# Altium PCB STM32.PcbDoc (part 2 of 10)
Units mil, origin at the board's own origin, x right, y up, seen from the top; angles counter-clockwise.
Board outline 3925 x 3925 mil, 2 copper layers (Top Layer, Bottom Layer); 152 components, 142 nets, 670 pads, 189 vias.
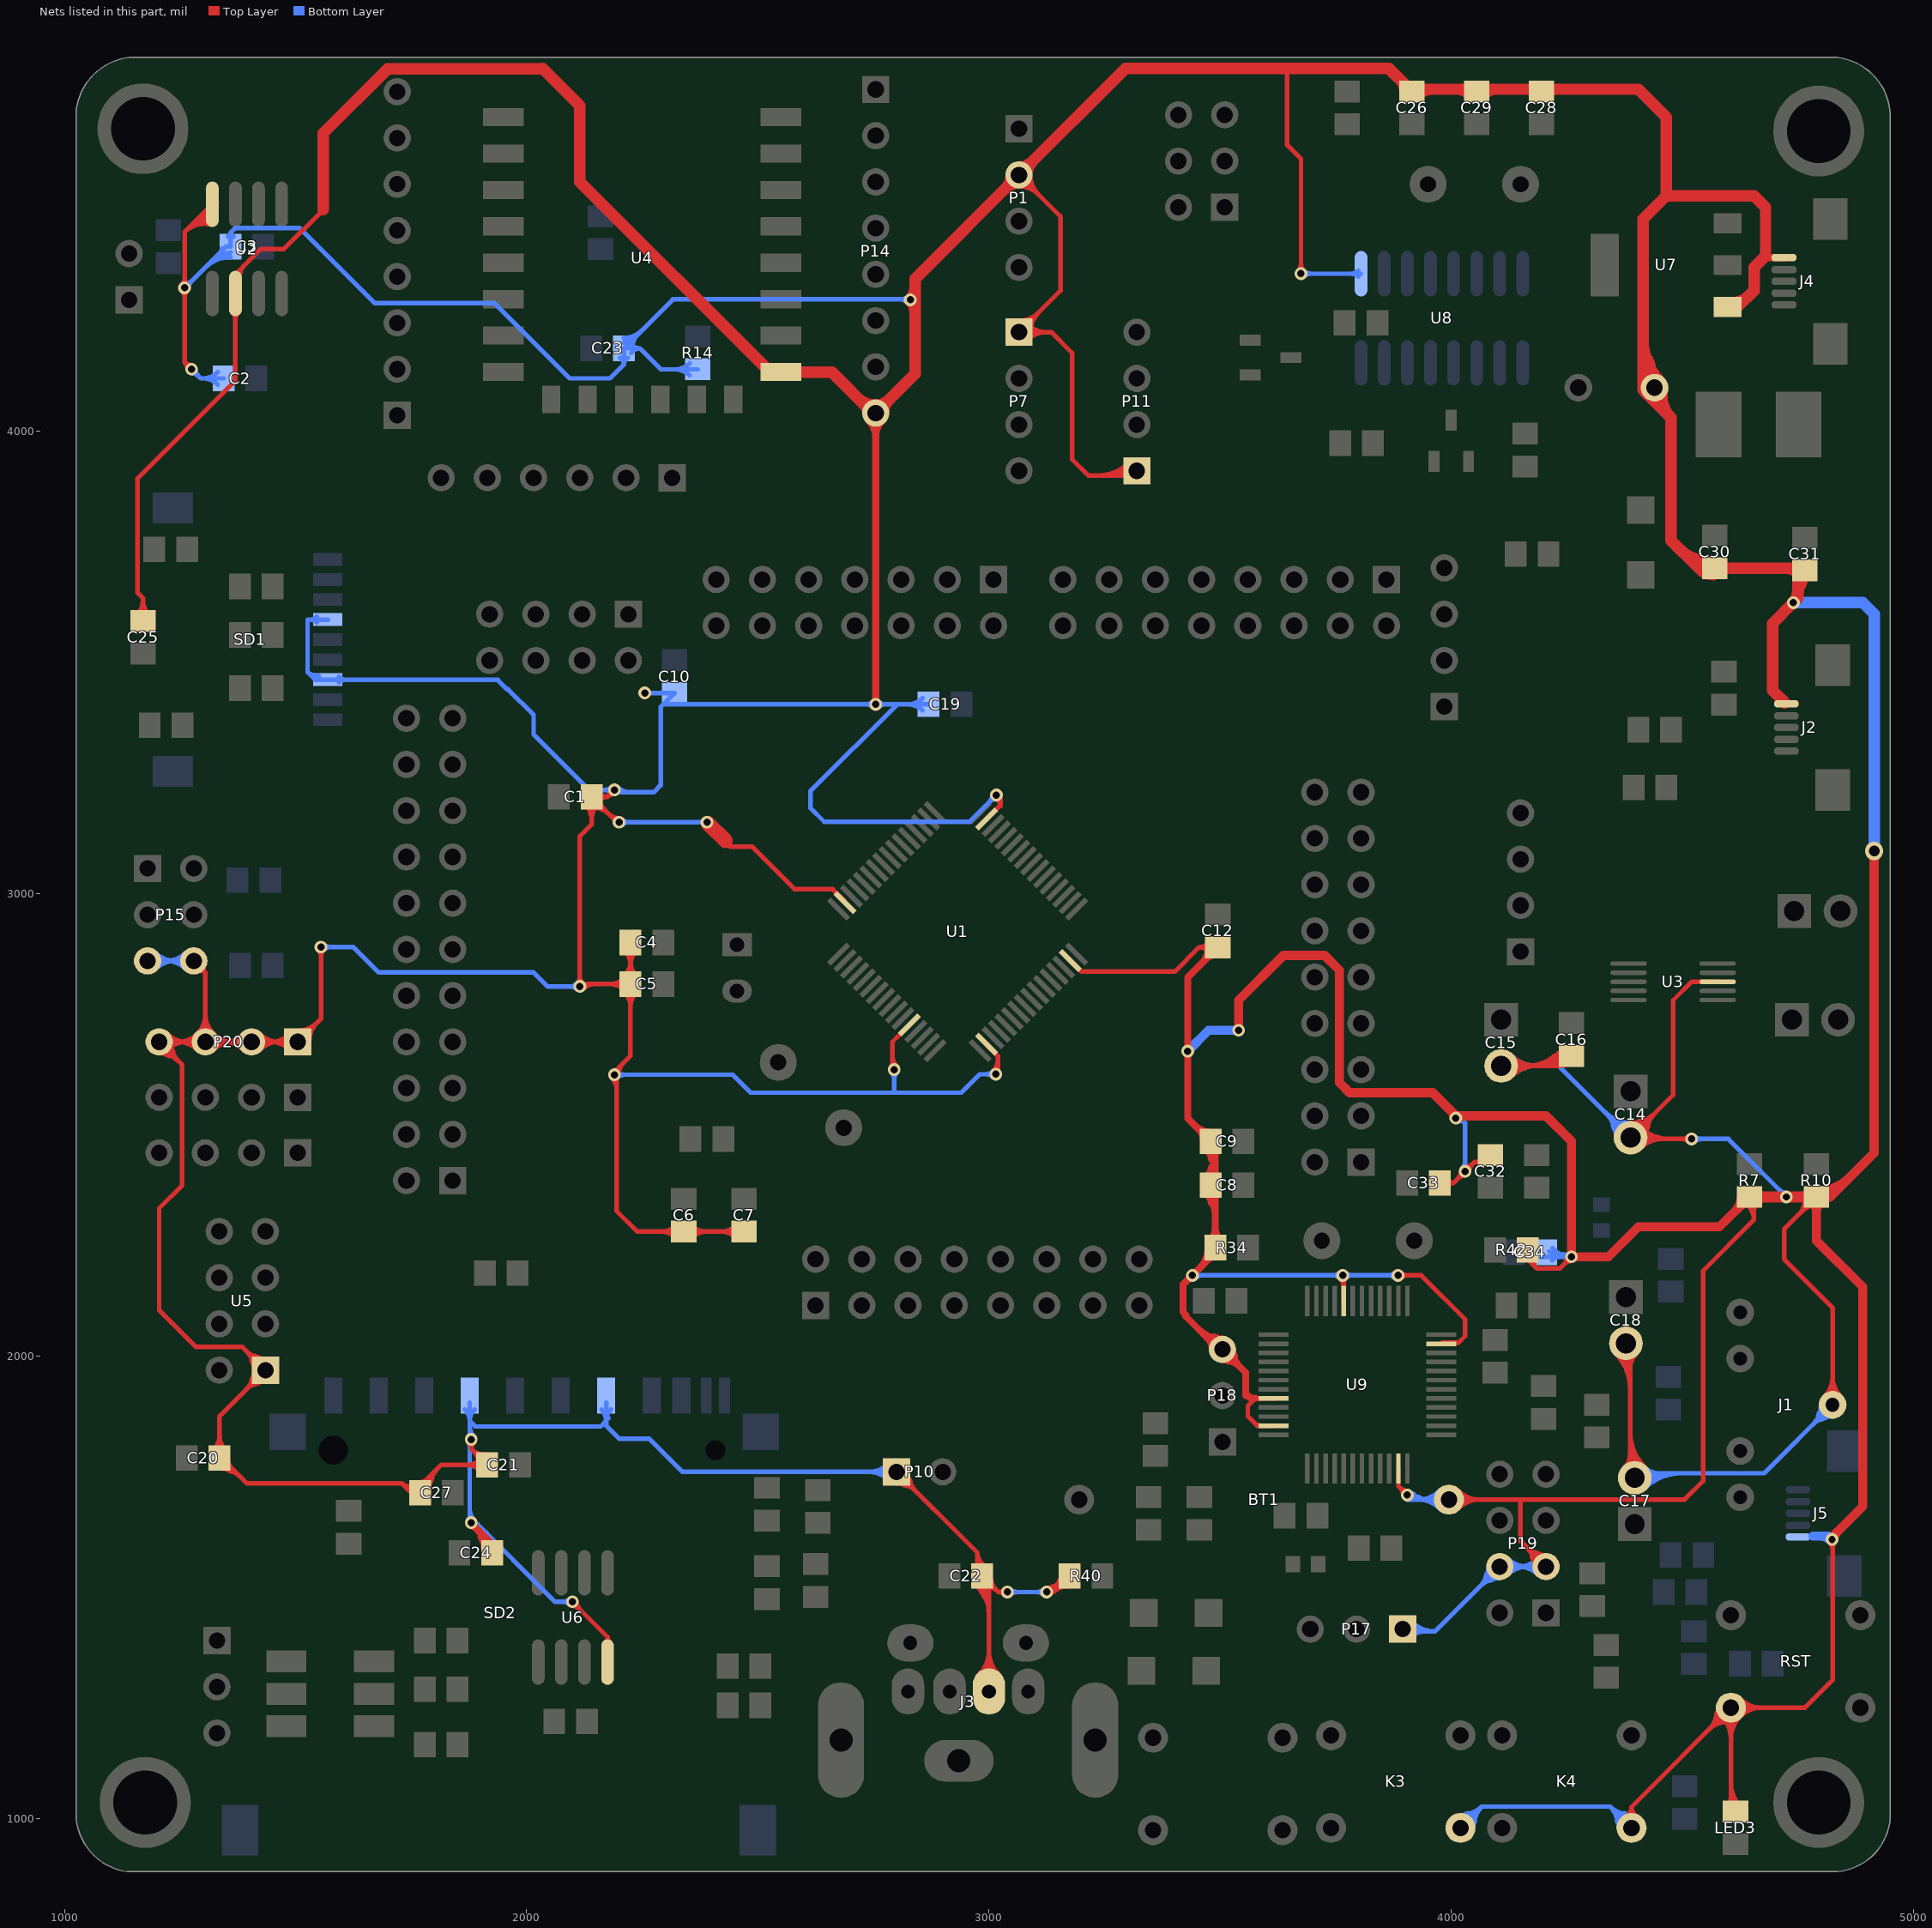
[diagram p2: the nets of this part, all layers, seen from the top]

## Via types
v1: diameter 27.56, hole 15.75, Top Layer to Bottom Layer, tented both sides, 185 vias
v2: diameter 39.37, hole 23.62, Top Layer to Bottom Layer, tented both sides, 3 vias
v3: diameter 39.37, hole 27.56, Top Layer to Bottom Layer, tented both sides, 1 vias

## Nets (pads, with @x,y where several pads share a name; then routed paths per layer and width w, separated by ;. In a path a pad name is that pad's centre, name@x,y a point inside that pad or via, vN(x,y) a via of type N, cw(c..) or ccw(c..) an arc to the next point about the centre after c; other vN are vias at no path point) (continued)
GND: BT1.2 C1.2 C2.2 C3.1 C4.1 C5.1 C6.1 C7.1 C8.1 C9.1 C10.2 C12.2 C14.2 C15.2 C16.2 C17.2 C18.2 C19.2 C20.1 C21.2 C22.1 C23.2 C24.2 C25.2 C26.2 C27.2 C28.1 C29.1 C30.1 C31.1 C32.1 C33.1 C34.1 J1.1 J2.4 J3.3 J4.4 J5.4 K3.1 K4.1 LED3.2 P1.2 P7.1 P10.1 P11.1 P14.8 P15.5 P15.6 P17.1 P18.3 P19.3 P19.4 P20.1 P20.2 P20.3 P20.4 pad.0@4440,4095 R7.1 R10.1 R14.1 R34.1 R40.1 R42.1 RST.2 SD1.3 SD1.6 SD2.3 SD2.6 U1.12 U1.18 U1.31 U1.47 U1.63 U2.2 U2.8 U3.8 U4.8 U5.1 U6.4 U7.1 U8.1 U9.8 U9.20 U9.23 U9.35 U9.47 | length 66983.9
  Top Layer w6: U1.63@2687.51,2984.47 2688.92,2985.88 U1.63@2688.92,2981.35
  Top Layer w10: C25.2@1170,3590.43 1170,3640 1158,3652 1158,3898 1370,4110 U2.2@1370,4298.54 1370,4340 1425,4395 1475,4395 1559.99,4479.99 ; P20.4@1199.64,2678.9 ccw(c1237.3,2686.61) 1227.35,2649.48 ; P20.4@1206.1,2685.36 cw(c1198.39,2647.7) 1235.52,2657.65 ; v1@1253.79,4304.91 cw(c1238.8,4289.92) 1260,4289.92 cw(c1281.2,4289.92) v1@1266.21,4304.91 ; v1@1253.79,4317.32 ccw(c1238.8,4332.31) 1260,4332.31 ccw(c1281.2,4332.31) v1@1266.21,4317.32 ; 1263.77,4144.15 ccw(c1277.64,4147.87) v1@1274.76,4133.8 ; 1265.85,4146.23 cw(c1262.13,4132.36) v1@1276.2,4135.24 ; 1272.5,4443.95 cw(c1308.11,4408.35) U2.8@1320.3,4457.21 ; v1(1275,4135) 1260,4150 ; P15.6@1280,2855 1305,2830 ; 1285,4456.45 cw(c1313.1,4428.35) U2.8@1322.72,4466.91 ; P20.3@1287.66,2662.66 ccw(c1245.79,2620.79) 1245.79,2680 ccw(c1245.79,2739.21) 1287.66,2697.34 ccw(c1245.79,2739.21) 1305,2739.21 ccw(c1364.21,2739.21) 1322.34,2697.34 ccw(c1364.21,2739.21) 1364.21,2680 ccw(c1364.21,2620.79) P20.3@1322.34,2662.66 ; 1297.49,4468.95 cw(c1318.09,4448.35) U2.8@1325.14,4476.61 ; U2.8@1309.99,4481.44 cw(c1323.08,4468.36) U2.8@1327.56,4486.32 ; U2.8@1317.88,4447.5 ccw(c1303.12,4388.34) 1260,4431.46 ; U2.8@1320,4491.46 1260,4431.46 ; U2.8@1322.48,4493.94 cw(c1328.07,4488.36) U2.8@1329.98,4496.02 ; C20.1@1334.13,1775.6 ccw(c1371.73,1789.06) 1361.4,1750.48 ; C20.1@1335.43,1780 C20.1@1335.43,1784.57 ; U2.2@1363.79,4256.9 cw(c1348.8,4241.92) 1370,4241.92 cw(c1391.2,4241.92) U2.2@1376.21,4256.9 ; U2.2@1378.78,4333.98 cw(c1414.52,4333.98) 1389.25,4359.25 ; P20.2@1387.66,2662.66 ccw(c1345.79,2620.79) 1345.79,2680 ccw(c1345.79,2739.21) P20.2@1387.66,2697.34 ; P20.2@1394.73,2669.73 ccw(c1369.93,2644.93) 1369.93,2680 ccw(c1369.93,2715.07) P20.2@1394.73,2690.27 ; 1404.48,1947.65 cw(c1441.61,1937.7) U5.1@1433.9,1975.36 ; 1404.48,1992.35 ccw(c1441.61,2002.3) U5.1@1433.9,1964.64 ; 1412.65,1939.48 ccw(c1402.7,1976.61) U5.1@1440.36,1968.9 ; 1412.65,2000.52 cw(c1402.7,1963.39) U5.1@1440.36,1971.1 ; P20.2@1415.27,2669.73 cw(c1440.07,2644.93) 1440.07,2680 cw(c1440.07,2715.07) P20.2@1415.27,2690.27 ; P20.2@1422.34,2662.66 cw(c1464.21,2620.79) 1464.21,2680 cw(c1464.21,2739.21) P20.2@1422.34,2697.34 ; P20.1@1487.66,2662.66 ccw(c1445.79,2620.79) 1445.79,2680 ccw(c1445.79,2739.21) P20.1@1487.66,2697.34 ; P20.1@1494.73,2669.73 ccw(c1469.93,2644.93) 1469.93,2680 ccw(c1469.93,2715.07) P20.1@1494.73,2690.27 ; P20.1@1505,2694.53 ccw(c1505,2729.6) 1529.8,2704.8 ccw(c1554.6,2680) P20.1@1519.53,2680 ; P20.1@1505,2704.53 ccw(c1505,2763.74) 1546.87,2721.87 ccw(c1588.74,2680) P20.1@1529.53,2680 ; v1@1548.79,2878.79 cw(c1533.8,2863.8) 1555,2863.8 cw(c1576.2,2863.8) v1@1561.21,2878.79 ; v1(1555,2885) 1555,2730 P20.1@1505,2680 P20.2@1405,2680 1323,2680 1323,2698 P20.3@1305,2680 ; C27.2@1770.07,1707.65 ccw(c1754.62,1747.01) 1795.46,1736.07 ; v1@1878.84,1639.63 ccw(c1895.1,1644.86) 1890.68,1628.36 ; v1@1881,1817 1881,1798.57 ; v1@1888.37,1637.33 ccw(c1900.91,1633.34) 1894.33,1621.94 ; 1898.58,1610.68 ccw(c1948.88,1623.78) C24.2@1924.8,1577.72 ; C24.2@1909.37,1588.36 ccw(c1895.12,1596.72) C24.2@1911.11,1600.89 ; 1909.36,1607.6 ccw(c1938.07,1615.08) C24.2@1928.28,1587.08 ; C24.2@1925.43,1575 1925.43,1597.57 v1@1881,1642 ; v1@2097.8,1468.76 ccw(c2111.87,1471.64) 2108.15,1457.77 ; v1(2099,1469) 2175,1393 ; v1@2099.24,1470.2 cw(c2096.36,1456.13) 2110.23,1459.85 ; v1@2108.79,2806.21 ccw(c2093.8,2821.2) 2115,2821.2 ccw(c2136.2,2821.2) v1@2121.21,2806.21 ; v1@2115,2805 2115,3124.57 2140.43,3150 C1.2@2140.43,3210 ; v1@2120,2805 C5.1@2224.57,2805 ; v1@2121.21,2793.79 cw(c2148.27,2766.73) 2148.27,2805 ; C1.2@2127.27,3192.9 cw(c2095.48,3161.11) 2140.43,3161.11 cw(c2185.39,3161.11) C1.2@2153.6,3192.9 ; C1.2@2140.43,3187.44 cw(c2140.43,3132.98) 2178.94,3171.49 ; C1.2@2140.43,3197.44 cw(c2140.43,3167.12) C1.2@2161.87,3188.56 ; C1.2@2155.99,3199.76 cw(c2175,3187.23) 2175,3210 ; C1.2@2155.99,3220.24 ccw(c2175,3232.77) 2175,3210 ; C1.2@2159.06,3206.06 ccw(c2194.51,3206.06) 2169.44,3180.99 ; U6.4@2175,1338.54 2175,1393 ; 2177.22,3173.22 ccw(c2200,3196) v1@2200,3163.78 ; v1@2181.22,3225 cw(c2160.02,3225) 2175.01,3210.01 ; v1@2183.79,2602.79 cw(c2157.78,2576.78) 2194.57,2576.78 ; v1@2190,3216.22 ccw(c2190,3195.02) 2175.01,3210.01 ; v1(2190,3225) 2175,3210 ; v1@2195.95,3154.48 C1.2@2140.43,3210 ; v1@2198.78,2609 cw(c2234.46,2609) 2209.23,2634.23 ; C5.1@2211.4,2787.9 cw(c2179.61,2756.11) 2224.57,2756.11 cw(c2269.53,2756.11) C5.1@2237.74,2787.9 ; C5.1@2211.4,2791.83 ccw(c2179.61,2760.04) 2179.61,2805 ccw(c2179.61,2849.96) C5.1@2211.4,2818.17 ; C5.1@2211.4,2822.11 ccw(c2179.61,2853.9) 2224.57,2853.9 ccw(c2269.53,2853.9) C5.1@2237.74,2822.11 ; C4.1@2211.4,2877.9 cw(c2179.61,2846.11) 2224.57,2846.11 cw(c2269.53,2846.11) C4.1@2237.74,2877.9 ; C4.1@2224.57,2895 C5.1@2224.57,2805 ; C6.1@2322.9,2256.4 ccw(c2291.11,2224.61) 2291.11,2269.57 ccw(c2291.11,2314.53) C6.1@2322.9,2282.74 ; C6.1@2357.1,2256.4 cw(c2388.89,2224.61) 2388.89,2269.57 cw(c2388.89,2314.53) C6.1@2357.1,2282.74 ; v1@2390,3145 v1(2390,3155) v1@2395,3155 ; 2440,3102.5 2487.5,3102.5 2580,3010 2661.98,3010 U1.63@2687.51,2984.47 ; C7.1@2452.9,2256.4 ccw(c2421.11,2224.61) 2421.11,2269.57 ccw(c2421.11,2314.53) C7.1@2452.9,2282.74 ; C7.1@2470,2269.57 C6.1@2340,2269.57 2239.43,2269.57 2194.57,2314.43 2194.57,2619.57 2224.57,2649.57 C5.1@2224.57,2805 ; v1@2791.26,2623.26 2791.26,2680.03 2806.26,2695.03 ; 2791.26,2650.22 ccw(c2825.22,2650.22) v1@2801.21,2626.21 ; P10.1@2794.64,1748.9 ccw(c2832.3,1756.61) 2822.35,1719.48 ; P10.1@2800,1750 2975,1575 ; P10.1@2801.1,1755.36 cw(c2793.39,1717.7) 2830.52,1727.65 ; 2979.32,1496.44 cw(c2995.65,1506.49) C22.1@2984.64,1522.19 ; C22.1@2980.61,1503.08 cw(c2976.34,1487.12) 2990.65,1495.38 ; 2984.89,1487.4 cw(c3001.75,1497.79) C22.1@2990.38,1514 ; 2990.45,1478.36 cw(c3007.85,1489.08) C22.1@2996.12,1505.81 ; U1.18@2995.15,2675.13 2995.15,2673.43 3019.16,2649.41 v1@3019.16,2614.16 ; U1.47@2995.15,3162.31 3025,3192.16 3025,3205 v1(3016,3214) ; 2995.19,1487.51 cw(c3009.24,1495.62) C22.1@2998.16,1507.47 ; J3.3@3000,1275 3000,1500 3010.43,1500 ; v1@3008.79,2616.21 ccw(c2983.75,2641.25) 3019.16,2641.25 ; v1@3013.57,3205.56 cw(c3009.2,3190.38) 3025,3190.38 ; v1(3040,1490) 3020.43,1490 ; P7.1@3065,4229.53 ccw(c3065,4264.6) 3089.8,4239.8 ccw(c3114.6,4215) P7.1@3079.53,4215 ; P7.1@3065,4239.53 ccw(c3065,4298.74) 3106.87,4256.87 ccw(c3148.74,4215) P7.1@3089.53,4215 ; P1.2@3065,4530.47 cw(c3065,4471.26) 3106.87,4513.13 cw(c3148.74,4555) P1.2@3089.53,4555 ; P1.2@3065,4540.47 cw(c3065,4505.4) 3089.8,4530.2 cw(c3114.6,4555) P1.2@3079.53,4555 ; P1.2@3065,4555 3155,4465 3155,4305 P7.1@3065,4215 3135,4215 3180,4170 3180,3940 3215,3905 P11.1@3320,3905 ; P7.1@3075.27,4204.73 cw(c3100.07,4179.93) 3100.07,4215 cw(c3100.07,4250.07) P7.1@3075.27,4225.27 ; P7.1@3082.34,4197.65 cw(c3124.21,4155.78) 3124.21,4215 cw(c3124.21,4274.21) P7.1@3082.34,4232.34 ; v1@3123.94,1490.61 cw(c3146.47,1477.61) 3139.73,1502.73 ; v1(3125,1490) 3139.57,1490 ; v1@3132.16,1495.08 ccw(c3137.46,1498.85) 3139.14,1492.57 ccw(c3141.34,1484.34) v1@3133.3,1487.13 ; R40.1@3156.25,1524.4 cw(c3122.23,1530.61) 3139.52,1500.66 cw(c3157.08,1470.24) R40.1@3168.51,1503.45 ; R40.1@3174.57,1525 3139.57,1490 ; U1.31@3176.1,2856.08 3200.12,2832.06 3402.06,2832.06 3454.57,2884.57 ; 3236.64,3905 ccw(c3236.64,3998.36) P11.1@3302.66,3932.34 ; 3260.79,3905 ccw(c3260.79,3974.21) P11.1@3309.73,3925.27 ; P11.1@3302.66,3897.66 ccw(c3284.93,3879.93) 3284.93,3905 ccw(c3284.93,3950.07) P11.1@3316.8,3918.2 ; C12.2@3495,2884.57 3454.57,2884.57 ; U9.23@3615.92,1849.89 3580.11,1849.89 3560,1870 3560,1892.9 3578.25,1911.15 ; U9.20@3615.92,1908.95 3580.46,1908.95 3578.25,1911.15 ; 3645,4777 3645,4620 3675,4590 v1(3675,4341.46) ; v1@3668.79,4347.66 ccw(c3653.8,4362.65) 3675,4362.65 ccw(c3696.2,4362.65) v1@3681.21,4347.66 ; v1(3765.29,2175) 3767.5,2172.8 U9.8@3767.5,2119.58 ; v1(3885,2175) 3935,2175 4030,2080 4030,2043.47 4015.8,2029.26 3980.33,2029.26 U9.47@3978.13,2027.06 ; U9.35@3885.61,1757.37 3885.61,1719.39 v1(3905,1700) ; 3893.77,1709.15 ccw(c3907.64,1712.87) v1@3904.76,1698.8 ; 3895.85,1711.23 cw(c3892.13,1697.36) v1@3906.2,1700.24 ; C33.1@3975.43,2375 4005,2375 ; BT1.2@3995,1690 4155,1690 ; 4018.77,2390.85 cw(c4032.64,2387.13) v1@4029.76,2401.2 ; 4020.85,2388.77 ccw(c4017.13,2402.64) v1@4031.2,2399.76 ; v1@4028.8,2400.24 cw(c4042.87,2397.36) 4039.15,2411.23 ; v1@4030.24,2398.8 ccw(c4027.36,2412.87) 4041.23,2409.15 ; C32.1@4089.57,2420 4050,2420 v1(4030,2400) 4005,2375 ; C15.2@4101.43,2634.57 C15.2@4108,2628 4238.44,2628 C16.2@4260,2649.57 ; R42.1@4160.43,2225 4160.43,2214.57 4185,2190 ; 4174.48,1567.35 ccw(c4211.61,1577.3) P19.3@4203.9,1539.64 ; 4182.65,1575.52 cw(c4172.7,1538.39) P19.3@4210.36,1546.1 ; P19.3@4205,1545 4150,1600 4150,1685 4155,1690 ; 4211.79,2633.62 cw(c4229.12,2603.62) C16.2@4246.64,2633.5 ; 4212.48,2641.98 cw(c4224.78,2623.97) C16.2@4241.65,2637.77 ; 4221.49,2648.13 cw(c4233.25,2630.9) C16.2@4249.39,2644.11 ; 4226.68,2642.21 cw(c4239.12,2620.67) C16.2@4251.7,2642.13 ; 4230.38,2644.35 ccw(c4222.12,2658.66) C16.2@4238.08,2654.39 ; 4230.5,2654.28 cw(c4241.73,2637.83) C16.2@4257.13,2650.44 ; C16.2@4237.47,2650.56 cw(c4212.21,2651.92) 4224.86,2630.01 cw(c4239.45,2604.74) C16.2@4249.59,2632.1 ; 4248.77,2205.85 cw(c4262.64,2202.13) v1@4259.76,2216.2 ; 4250.85,2203.77 ccw(c4247.13,2217.64) v1@4261.2,2214.76 ; v1(4260,2215) 4235,2190 4185,2190 ; C18.2@4378,2028 4387,2019 C17.2@4387,1737 ; C14.2@4379.59,2474.72 cw(c4426.58,2465.1) 4414.17,2511.43 ; C14.2@4387.72,2474.39 ccw(c4376.47,2529.31) 4430.62,2514.8 ; C14.2@4389.39,2472.72 cw(c4444.31,2461.47) 4429.8,2515.62 ; C14.2@4389.72,2464.59 ccw(c4380.1,2511.58) 4426.43,2499.17 ; K4.1@4390,980 4390,1025 ; C14.2@4390.76,2484.08 ccw(c4396.45,2506.93) 4417.26,2495.91 ; C14.2@4393.18,2493.78 ccw(c4399.63,2519.71) 4423.25,2507.2 ; C14.2@4397.23,2503.03 ccw(c4404.34,2526.13) 4415.65,2504.77 ; C14.2@4397.46,2502.96 ccw(c4405.56,2528.63) 4424.56,2509.56 ; C14.2@4397.51,2502.94 ccw(c4405.61,2528.45) 4424.56,2509.56 ; C14.2@4397.56,2502.93 ccw(c4405.66,2528.24) 4424.42,2509.42 ; C14.2@4397.61,2502.91 ccw(c4405.7,2528.07) 4424.42,2509.42 ; C14.2@4399.08,2475.76 cw(c4421.93,2481.45) 4410.91,2502.26 ; C14.2@4408.78,2478.18 cw(c4434.71,2484.63) 4422.2,2508.25 ; C14.2@4417.91,2482.61 cw(c4443.07,2490.7) 4424.42,2509.42 ; C14.2@4417.96,2482.46 cw(c4443.63,2490.56) 4424.56,2509.56 ; C14.2@4417.94,2482.51 cw(c4443.45,2490.61) 4424.56,2509.56 ; C14.2@4417.93,2482.56 cw(c4443.24,2490.66) 4424.42,2509.42 ; C14.2@4418.03,2482.23 cw(c4441.13,2489.34) 4419.77,2500.65 ; v1(4520,2470) 4391,2470 C14.2@4388,2473 4480,2565 4480,2770 4520,2810 U3.8@4576.46,2810 ; 4569.22,1209.18 cw(c4613.75,1197.25) RST.2@4604.5,1242.42 ; 4573.4,1224.81 cw(c4610.12,1214.98) RST.2@4602.5,1252.22 ; 4574.18,1204.22 ccw(c4562.25,1248.75) RST.2@4607.42,1239.5 ; 4589.81,1208.4 ccw(c4579.98,1245.12) RST.2@4617.22,1237.5 ; LED3.2@4605,1035.43 RST.2@4605,1240 ; R7.1@4645,2344.57 4655,2334.57 4655,2295 4545,2185 4545,1730 4505,1690 4155,1690 ; 4761.15,2321.1 cw(c4795.15,2312) R10.1@4785.69,2345.9 ; R10.1@4790,2344.57 4720,2274.57 4720,2210 4825,2105 J1.1@4825,1895 ; v1@4817.61,1597.61 cw(c4799.78,1579.78) 4825,1579.78 ; v1(4823.82,1603.82) 4825,1610 4825,1300 4765,1240 RST.2@4605,1240 ; 4825,1585.47 cw(c4842.17,1585.47) v1@4830.03,1597.61 ; 1170,3635.39 ccw(c1214.96,3635.39) 1183.17,3603.6 cw(c1214.96,3635.39) 1170,3635.39 ; 1170,3635.39 cw(c1125.04,3635.39) 1156.83,3603.6 ccw(c1125.04,3635.39) 1170,3635.39 ; 1229.8,2655.2 ccw(c1205,2630.4) 1205,2665.47 cw(c1205,2630.4) 1229.8,2655.2 ; 1229.8,2655.2 cw(c1254.6,2680) 1219.53,2680 ccw(c1254.6,2680) 1229.8,2655.2 ; 1240.07,2680 ccw(c1240.07,2644.93) 1215.27,2669.73 cw(c1240.07,2644.93) 1240.07,2680 ; 1240.07,2680 cw(c1240.07,2715.07) 1215.27,2690.27 ccw(c1240.07,2715.07) 1240.07,2680 ; 1246.87,2638.13 ccw(c1205,2596.26) 1205,2655.47 cw(c1205,2596.26) 1246.87,2638.13 ; 1246.87,2638.13 cw(c1288.74,2680) 1229.53,2680 ccw(c1288.74,2680) 1246.87,2638.13 ; 1260.01,4149.99 ccw(c1275,4164.98) 1275,4143.78 cw(c1275,4164.98) 1260.01,4149.99 ; 1260.01,4149.99 cw(c1245.02,4135) 1266.22,4135 ccw(c1245.02,4135) 1260.01,4149.99 ; 1260,4150 v1(1260,4311.11) 1260,4431.46 ; 1264.21,2680 ccw(c1264.21,2620.79) 1222.34,2662.66 cw(c1264.21,2620.79) 1264.21,2680 ; 1264.21,2680 cw(c1264.21,2739.21) 1222.34,2697.34 ccw(c1264.21,2739.21) 1264.21,2680 ; 1269.93,2680 ccw(c1269.93,2715.07) P20.3@1294.73,2690.27 ; 1269.93,2680 cw(c1269.93,2644.93) 1294.73,2669.73 ccw(c1269.93,2644.93) 1269.93,2680 ; 1269.93,2680 ccw(c1269.93,2715.07) P20.3@1294.73,2690.27 ; P20.3@1294.73,2690.27 ccw(c1269.93,2715.07) 1305,2715.07 ; P20.3@1294.73,2690.27 ccw(c1269.93,2715.07) 1305,2715.07 ; P20.3@1305,2680 P20.4@1205,2680 1255,2630 1255,2370 1205,2320 1205,2100 1285,2020 1385,2020 U5.1@1435,1970 1335.43,1870.43 C20.1@1335.43,1784.57 ; P20.3@1305,2680 1305,2830 ; 1305,2715.07 ccw(c1340.07,2715.07) P20.3@1315.27,2690.27 ; 1305,2715.07 ccw(c1340.07,2715.07) P20.3@1315.27,2690.27 ; 1305,2830 ccw(c1295.65,2820.65) 1290.17,2832.68 cw(c1295.65,2820.65) 1305,2830 ; 1305,2830 cw(c1314.34,2839.34) 1302.32,2844.83 ccw(c1314.34,2839.34) 1305,2830 ; P20.3@1315.27,2690.27 ccw(c1340.07,2715.07) 1340.07,2680 ; P20.3@1315.27,2690.27 ccw(c1340.07,2715.07) 1340.07,2680 ; C20.1@1335.43,1784.57 1395,1725 1730,1725 ; 1335.43,1828.89 ccw(c1380.39,1828.89) 1348.6,1797.1 cw(c1380.39,1828.89) 1335.43,1828.89 ; 1335.43,1828.89 cw(c1290.47,1828.89) 1322.26,1797.1 ccw(c1290.47,1828.89) 1335.43,1828.89 ; 1340.07,2680 ccw(c1340.07,2644.93) 1315.27,2669.73 cw(c1340.07,2644.93) 1340.07,2680 ; 1393.13,1928.13 ccw(c1351.26,1970) U5.1@1410.47,1970 ; 1393.13,1928.13 cw(c1435,1886.26) 1435,1945.47 ccw(c1435,1886.26) 1393.13,1928.13 ; 1393.13,1928.13 ccw(c1351.26,1970) U5.1@1410.47,1970 ; 1393.13,2011.87 ccw(c1435,2053.74) 1435,1994.53 cw(c1435,2053.74) 1393.13,2011.87 ; 1393.13,2011.87 cw(c1351.26,1970) U5.1@1410.47,1970 ; 1393.13,2011.87 cw(c1351.26,1970) U5.1@1410.47,1970 ; U5.1@1410.2,1945.2 ccw(c1385.4,1970) U5.1@1420.47,1970 ; U5.1@1410.2,1945.2 cw(c1435,1920.4) 1435,1955.47 ccw(c1435,1920.4) U5.1@1410.2,1945.2 ; U5.1@1410.2,1945.2 ccw(c1385.4,1970) U5.1@1420.47,1970 ; U5.1@1410.2,1994.8 ccw(c1435,2019.6) 1435,1984.53 cw(c1435,2019.6) U5.1@1410.2,1994.8 ; U5.1@1410.2,1994.8 cw(c1385.4,1970) U5.1@1420.47,1970 ; U5.1@1410.2,1994.8 cw(c1385.4,1970) U5.1@1420.47,1970 ; 1730,1725 ccw(c1744.81,1739.81) 1757.92,1723.47 cw(c1744.81,1739.81) 1730,1725 ; 1730,1725 1750,1705 C27.2@1769.57,1705 1769.57,1719.57 1815,1765 C21.2@1914.57,1765 1881,1798.57 ; 1869.61,1765 ccw(c1869.61,1809.96) 1901.4,1778.17 cw(c1869.61,1809.96) 1869.61,1765 ; 1869.61,1765 cw(c1869.61,1720.04) 1901.4,1751.83 ccw(c1869.61,1720.04) 1869.61,1765 ; v1@1877.73,1631.52 cw(c1870.59,1604.89) 1894.47,1618.67 ; v1@1877.73,1631.52 cw(c1870.59,1604.89) 1894.47,1618.67 ; v1@1877.73,1631.52 cw(c1870.59,1604.89) 1894.47,1618.67 ; v1@1881,1642 cw(c1818.69,1579.68) 1906.81,1579.07 ccw(c1818.69,1579.68) v1@1881,1642 ; 1881,1798.56 ccw(c1908.38,1825.94) 1912.56,1787.45 cw(c1908.38,1825.94) 1881,1798.56 ; 1881,1798.54 ccw(c1861.35,1798.54) 1874.24,1813.37 cw(c1861.35,1798.54) 1881,1798.54 ; v1@1888.48,1637.73 ccw(c1902.8,1633.89) 1889.96,1626.48 ; v1@1888.48,1637.73 ccw(c1902.8,1633.89) 1889.96,1626.48 ; v1@1888.48,1637.73 ccw(c1902.8,1633.89) 1889.96,1626.48 ; 2113.99,1454.01 ccw(c2099,1439.02) 2099,1460.22 cw(c2099,1439.02) 2113.99,1454.01 ; 2113.99,1454.01 cw(c2128.98,1469) 2107.78,1469 ccw(c2128.98,1469) 2113.99,1454.01 ; C1.2@2140.43,3210 2175,3210 ; 2175,1393 ccw(c2191.22,1393) 2180.69,1380.66 cw(c2191.22,1393) 2175,1393 ; 2175,1393 cw(c2158.78,1393) 2169.3,1380.66 ccw(c2158.78,1393) 2175,1393 ; P10.1@2824.8,1725.2 ccw(c2800,1700.4) 2800,1735.47 cw(c2800,1700.4) P10.1@2824.8,1725.2 ; P10.1@2824.8,1725.2 cw(c2849.6,1750) 2814.53,1750 ccw(c2849.6,1750) P10.1@2824.8,1725.2 ; 2841.87,1708.13 ccw(c2800,1666.26) 2800,1725.47 cw(c2800,1666.26) 2841.87,1708.13 ; 2841.87,1708.13 cw(c2883.74,1750) 2824.53,1750 ccw(c2883.74,1750) 2841.87,1708.13 ; 2975,1575 ccw(c3007.42,1575) 2993.45,1545.74 cw(c3007.42,1575) 2975,1575 ; 2975,1575 2975,1535.43 C22.1@2985.43,1525 3010.43,1500 ; C22.1@2992.3,1503.75 cw(c2998.51,1488.08) 3010.43,1500 ; C22.1@2992.3,1503.75 cw(c2998.51,1488.08) 3010.43,1500 ; C22.1@2992.3,1503.75 cw(c2998.51,1488.08) 3010.43,1500 ; C22.1@2992.3,1503.75 cw(c2998.51,1488.08) 3010.43,1500 ; 3000,1338.28 ccw(c3048.28,1338.28) 3014.14,1304.14 cw(c3048.28,1338.28) 3000,1338.28 ; 3000,1338.28 cw(c2951.72,1338.28) 2985.86,1304.14 ccw(c2951.72,1338.28) 3000,1338.28 ; 3000,1362.43 ccw(c3072.43,1362.43) 3021.21,1311.21 cw(c3072.43,1362.43) 3000,1362.43 ; 3000,1362.43 cw(c2927.57,1362.43) 2978.79,1311.21 ccw(c2927.57,1362.43) 3000,1362.43 ; C22.1@3003.92,1518.84 ccw(c3026.55,1516.11) 3010.43,1500 ; C22.1@3003.92,1518.84 ccw(c3026.55,1516.11) 3010.43,1500 ; C22.1@3003.92,1518.84 ccw(c3026.55,1516.11) 3010.43,1500 ; C22.1@3003.92,1518.84 ccw(c3026.55,1516.11) 3010.43,1500 ; 3010.43,1500 3020.43,1490 ; 3020.43,1490 ccw(c2989.99,1459.56) 2986.81,1502.49 cw(c2989.99,1459.56) 3020.43,1490 ; 3020.44,1490 ccw(c3020.44,1507.41) 3033.44,1495.84 cw(c3020.44,1507.41) 3020.44,1490 ; 3020.44,1490 cw(c3020.44,1472.59) 3033.44,1484.16 ccw(c3020.44,1472.59) 3020.44,1490 ; 3139.57,1490 cw(c3170.01,1459.56) 3173.19,1502.49 ccw(c3170.01,1459.56) 3139.57,1490 ; 3139.57,1490 ccw(c3139.57,1482.3) 3132.76,1485.9 cw(c3139.57,1482.3) 3139.57,1490 ; 3139.57,1490 cw(c3139.57,1497.7) 3132.76,1494.1 ccw(c3139.57,1497.7) 3139.57,1490 ; 3454.57,2884.57 ccw(c3454.57,2911.02) 3475.99,2895.49 cw(c3454.57,2911.02) 3454.57,2884.57 ; 3454.57,2884.57 cw(c3454.57,2858.11) 3475.99,2873.64 ccw(c3454.57,2858.11) 3454.57,2884.57 ; 3578.25,1911.15 ccw(c3585.05,1917.95) 3588.42,1908.95 cw(c3585.05,1917.95) 3578.25,1911.15 ; 3890.01,1714.99 ccw(c3905,1729.98) 3905,1708.78 cw(c3905,1729.98) 3890.01,1714.99 ; 3890.01,1714.99 cw(c3875.02,1700) 3896.22,1700 ccw(c3875.02,1700) 3890.01,1714.99 ; 3906.2,2175 ccw(c3906.2,2153.8) 3891.21,2168.79 cw(c3906.2,2153.8) 3906.2,2175 ; 3906.2,2175 cw(c3906.2,2196.2) 3891.21,2181.21 ccw(c3906.2,2196.2) 3906.2,2175 ; 4005,2375 ccw(c4005,2360.84) 3992.23,2366.96 cw(c4005,2360.84) 4005,2375 ; 4005,2375 cw(c4005,2389.16) 3992.23,2383.04 ccw(c4005,2389.16) 4005,2375 ; 4015.01,2385.01 ccw(c4000.02,2400) 4021.22,2400 cw(c4000.02,2400) 4015.01,2385.01 ; 4015.01,2385.01 cw(c4030,2370.02) 4030,2391.22 ccw(c4030,2370.02) 4015.01,2385.01 ; 4037.32,1690 ccw(c4037.32,1647.68) 4007.39,1677.61 cw(c4037.32,1647.68) 4037.32,1690 ; 4037.32,1690 cw(c4037.32,1732.32) 4007.39,1702.39 ccw(c4037.32,1732.32) 4037.32,1690 ; 4044.99,2414.99 ccw(c4059.98,2400) 4038.78,2400 cw(c4059.98,2400) 4044.99,2414.99 ; 4044.99,2414.99 cw(c4030,2429.98) 4030,2408.78 ccw(c4030,2429.98) 4044.99,2414.99 ; 4061.46,1690 ccw(c4061.46,1623.54) 4014.46,1670.54 cw(c4061.46,1623.54) 4061.46,1690 ; 4061.46,1690 cw(c4061.46,1756.46) 4014.46,1709.46 ccw(c4061.46,1756.46) 4061.46,1690 ; 4159.71,2628 ccw(c4159.71,2576.29) 4123.14,2612.86 cw(c4159.71,2576.29) 4159.71,2628 ; 4159.71,2628 cw(c4159.71,2679.71) 4123.14,2643.14 ccw(c4159.71,2679.71) 4159.71,2628 ; 4163.13,1586.87 ccw(c4205,1628.74) 4205,1569.53 cw(c4205,1628.74) 4163.13,1586.87 ; 4163.13,1586.87 cw(c4121.26,1545) 4180.47,1545 ccw(c4121.26,1545) 4163.13,1586.87 ; 4180.2,1569.8 ccw(c4205,1594.6) 4205,1559.53 cw(c4205,1594.6) 4180.2,1569.8 ; 4180.2,1569.8 cw(c4155.4,1545) 4190.47,1545 ccw(c4155.4,1545) 4180.2,1569.8 ; 4183.85,2628 ccw(c4183.85,2552.15) 4130.22,2605.78 cw(c4183.85,2552.15) 4183.85,2628 ; 4183.85,2628 cw(c4183.85,2703.85) 4130.22,2650.22 ccw(c4183.85,2703.85) 4183.85,2628 ; 4185,2190 cw(c4200.6,2205.6) 4181.53,2216.7 ccw(c4200.6,2205.6) 4185,2190 ; 4245.01,2200.01 ccw(c4230.02,2215) 4251.22,2215 cw(c4230.02,2215) 4245.01,2200.01 ; 4245.01,2200.01 cw(c4260,2185.02) 4260,2206.22 ccw(c4260,2185.02) 4245.01,2200.01 ; 4387,1788.71 ccw(c4448.71,1788.71) 4405.07,1745.07 cw(c4448.71,1788.71) 4387,1788.71 ; 4387,1788.71 cw(c4345.29,1788.71) 4374.78,1759.22 ccw(c4345.29,1788.71) 4387,1788.71 ; 4390,1025 ccw(c4413.02,1025) 4402.54,1004.51 cw(c4413.02,1025) 4390,1025 ; 4390,1025 cw(c4366.98,1025) 4377.47,1004.51 ccw(c4366.98,1025) 4390,1025 ; 4390,1025 RST.2@4605,1240 ; 4424.56,2509.56 ccw(c4461.12,2473) 4409.42,2473 cw(c4461.12,2473) 4424.56,2509.56 ; 4424.56,2509.56 cw(c4388,2546.12) 4388,2494.42 ccw(c4388,2546.12) 4424.56,2509.56 ; 4441.63,2526.63 ccw(c4495.27,2473) 4419.42,2473 cw(c4495.27,2473) 4441.63,2526.63 ; 4441.63,2526.63 cw(c4388,2580.27) 4388,2504.42 ccw(c4388,2580.27) 4441.63,2526.63 ; 4498.8,2470 ccw(c4498.8,2491.2) 4513.79,2476.21 cw(c4498.8,2491.2) 4498.8,2470 ; 4498.8,2470 cw(c4498.8,2448.8) 4513.79,2463.79 ccw(c4498.8,2448.8) 4498.8,2470 ; 4558.01,1193.01 ccw(c4511.02,1240) 4577.47,1240 cw(c4511.02,1240) 4558.01,1193.01 ; 4558.01,1193.01 cw(c4605,1146.02) 4605,1212.47 ccw(c4605,1146.02) 4558.01,1193.01 ; 4575.08,1210.08 ccw(c4545.16,1240) 4587.47,1240 cw(c4545.16,1240) 4575.08,1210.08 ; 4575.08,1210.08 cw(c4605,1180.16) 4605,1222.47 ccw(c4605,1180.16) 4575.08,1210.08 ; 4605,1173.54 ccw(c4538.54,1173.54) 4585.54,1220.54 cw(c4538.54,1173.54) 4605,1173.54 ; 4605,1173.54 cw(c4671.46,1173.54) RST.2@4624.46,1220.54 ; 4605,1173.54 cw(c4671.46,1173.54) RST.2@4624.46,1220.54 ; 4605,1197.68 ccw(c4562.68,1197.68) 4592.61,1227.61 cw(c4562.68,1197.68) 4605,1197.68 ; 4605,1197.68 cw(c4647.32,1197.68) RST.2@4617.39,1227.61 ; 4605,1197.68 cw(c4647.32,1197.68) RST.2@4617.39,1227.61 ; RST.2@4617.39,1227.61 cw(c4647.32,1197.68) 4647.32,1240 ; RST.2@4617.39,1227.61 cw(c4647.32,1197.68) 4647.32,1240 ; RST.2@4624.46,1220.54 cw(c4671.46,1173.54) 4671.46,1240 ; RST.2@4624.46,1220.54 cw(c4671.46,1173.54) 4671.46,1240 ; 4647.32,1240 cw(c4647.32,1282.32) 4617.39,1252.39 ccw(c4647.32,1282.32) 4647.32,1240 ; 4671.46,1240 cw(c4671.46,1306.46) 4624.46,1259.46 ccw(c4671.46,1306.46) 4671.46,1240 ; 4825,1931.22 ccw(c4861.21,1931.22) 4835.61,1905.61 cw(c4861.21,1931.22) 4825,1931.22 ; 4825,1931.22 cw(c4788.79,1931.22) 4814.39,1905.61 ccw(c4788.79,1931.22) 4825,1931.22 ; 4825,1955.36 ccw(c4885.36,1955.36) 4842.68,1912.68 cw(c4885.36,1955.36) 4825,1955.36 ; 4825,1955.36 cw(c4764.64,1955.36) 4807.32,1912.68 ccw(c4764.64,1955.36) 4825,1955.36 ; C20.1@1335.43,1757.44 cw(c1335.43,1691.95) 1381.74,1738.26 ccw(c1335.43,1691.95) C20.1@1335.43,1757.44 ; C20.1@1335.43,1767.44 cw(c1335.43,1726.09) 1364.67,1755.33 ccw(c1335.43,1726.09) C20.1@1335.43,1767.44 ; C20.1@1354.05,1776.06 ccw(c1378.48,1776.06) 1361.21,1758.79 cw(c1378.48,1776.06) C20.1@1354.05,1776.06 ; 1737.89,1717.11 ccw(c1751.84,1731.05) 1764.17,1715.66 cw(c1751.84,1731.05) 1737.89,1717.11 ; 1745.79,1709.21 ccw(c1758.86,1722.29) 1770.43,1707.86 cw(c1758.86,1722.29) 1745.79,1709.21 ; C27.2@1769.57,1727.56 ccw(c1769.57,1746.86) 1783.21,1733.21 cw(c1769.57,1746.86) C27.2@1769.57,1727.56 ; C27.2@1778.19,1708.94 cw(c1824.66,1708.94) 1791.8,1741.8 ccw(c1824.66,1708.94) C27.2@1778.19,1708.94 ; C27.2@1788.19,1708.94 cw(c1858.81,1708.94) 1808.87,1758.87 ccw(c1858.81,1708.94) C27.2@1788.19,1708.94 ; v1@1880,1631.22 cw(c1880,1602.78) 1900.11,1622.89 ccw(c1880,1602.78) v1@1880,1631.22 ; 1881,1801.22 cw(c1898.78,1801.22) 1886.21,1813.79 ccw(c1898.78,1801.22) 1881,1801.22 ; 1885.56,1794.01 cw(c1860.49,1768.94) 1895.94,1768.94 ccw(c1860.49,1768.94) 1885.56,1794.01 ; v1@1888.78,1640 ccw(c1902.73,1640) 1892.87,1630.13 cw(c1902.73,1640) v1@1888.78,1640 ; C21.2@1895.76,1783.8 ccw(c1911.27,1799.31) 1913.64,1777.51 cw(c1911.27,1799.31) C21.2@1895.76,1783.8 ; 1897.91,1625.09 cw(c1852.26,1579.45) 1916.81,1579 ccw(c1852.26,1579.45) 1897.91,1625.09 ; 1914.81,1608.19 cw(c1885.84,1579.21) 1926.81,1578.93 ccw(c1885.84,1579.21) 1914.81,1608.19 ; C22.1@2972.27,1507.9 cw(c2905.31,1440.94) 3000,1440.94 ccw(c2905.31,1440.94) C22.1@2972.27,1507.9 ; 2975,1559.15 ccw(c2999.85,1559.15) 2989.15,1536.72 cw(c2999.85,1559.15) 2975,1559.15 ; C22.1@2979.34,1514.97 cw(c2929.45,1465.08) 3000,1465.08 ccw(c2929.45,1465.08) C22.1@2979.34,1514.97 ; C22.1@2986.41,1522.04 cw(c2953.6,1489.22) 3000,1489.22 ccw(c2953.6,1489.22) C22.1@2986.41,1522.04 ; C22.1@3004.06,1521.06 ccw(c3039.51,1521.06) 3014.44,1495.99 cw(c3039.51,1521.06) C22.1@3004.06,1521.06 ; v1@3125,1488.78 ccw(c3125,1521) 3147.79,1498.22 cw(c3125,1521) v1@3125,1488.78 ; v1@3125,1498.78 ccw(c3125,1555.15) 3164.86,1515.29 cw(c3125,1555.15) v1@3125,1498.78 ; 3145.56,1495.99 ccw(c3120.49,1521.06) 3155.95,1521.06 cw(c3120.49,1521.06) 3145.56,1495.99 ; R40.1@3155,1505.43 cw(c3172.14,1488.29) 3173.93,1512.46 ccw(c3172.14,1488.29) R40.1@3155,1505.43 ; 3574.23,1855.77 ccw(c3588.42,1869.96) 3588.42,1849.89 cw(c3588.42,1869.96) 3574.23,1855.77 ; v1@3759.08,2168.79 cw(c3738.78,2148.48) 3767.5,2148.48 ccw(c3738.78,2148.48) v1@3759.08,2168.79 ; 3767.5,2159.13 cw(c3781.17,2159.13) 3771.5,2168.79 ccw(c3781.17,2159.13) 3767.5,2159.13 ; U9.47@4005.63,2027.06 cw(c4010.95,2021.74) 4010.95,2029.26 ccw(c4010.95,2021.74) U9.47@4005.63,2027.06 ; 4159.04,2628 ccw(c4159.04,2746.59) 4242.9,2662.73 cw(c4159.04,2746.59) 4159.04,2628 ; R42.1@4172.89,2221.73 ccw(c4188.99,2212.36) 4175.81,2199.19 cw(c4188.99,2212.36) R42.1@4172.89,2221.73 ; 4183.18,2628 ccw(c4183.18,2722.45) 4249.97,2655.66 cw(c4183.18,2722.45) 4183.18,2628 ; 4207.33,2628 ccw(c4207.33,2698.3) 4257.04,2648.59 cw(c4207.33,2698.3) 4207.33,2628 ; 4231.47,2628 ccw(c4231.47,2674.16) 4264.11,2641.52 cw(c4231.47,2674.16) 4231.47,2628 ; C18.2@4355.78,2005.78 cw(c4280.42,1930.42) 4387,1930.42 ccw(c4280.42,1930.42) C18.2@4355.78,2005.78 ; C18.2@4362.86,2012.86 cw(c4304.57,1954.57) 4387,1954.57 ccw(c4304.57,1954.57) C18.2@4362.86,2012.86 ; C18.2@4369.93,2019.93 cw(c4328.71,1978.71) 4387,1978.71 ccw(c4328.71,1978.71) C18.2@4369.93,2019.93 ; 4387,1812.85 ccw(c4472.85,1812.85) 4412.14,1752.14 cw(c4472.85,1812.85) 4387,1812.85 ; 4387,1836.99 ccw(c4496.99,1836.99) 4419.22,1759.22 cw(c4496.99,1836.99) 4387,1836.99 ; 4387,1973.88 cw(c4432.12,1973.88) 4400.22,2005.78 ccw(c4432.12,1973.88) 4387,1973.88 ; C14.2@4403.14,2457.86 cw(c4432.46,2428.54) 4432.46,2470 ccw(c4432.46,2428.54) C14.2@4403.14,2457.86 ; C14.2@4403.14,2488.14 ccw(c4446.95,2531.95) 4446.95,2470 cw(c4446.95,2531.95) C14.2@4403.14,2488.14 ; C14.2@4410.22,2450.78 cw(c4456.61,2404.39) 4456.61,2470 ccw(c4456.61,2404.39) C14.2@4410.22,2450.78 ; C14.2@4410.22,2495.22 ccw(c4471.09,2556.09) 4471.09,2470 cw(c4471.09,2556.09) C14.2@4410.22,2495.22 ; LED3.2@4597.9,1028.6 ccw(c4580.74,1045.75) 4605,1045.75 cw(c4580.74,1045.75) LED3.2@4597.9,1028.6 ; 4605,1050.89 ccw(c4646.52,1050.89) 4617.16,1021.53 cw(c4646.52,1050.89) 4605,1050.89 ; 4605,1075.03 ccw(c4670.66,1075.03) 4624.23,1028.6 cw(c4670.66,1075.03) 4605,1075.03 ; R7.1@4637.63,2329.77 cw(c4610.78,2294.63) 4655,2294.63 ccw(c4610.78,2294.63) R7.1@4637.63,2329.77 ; R7.1@4643.7,2337.72 cw(c4626.23,2314.86) 4655,2314.86 ccw(c4626.23,2314.86) R7.1@4643.7,2337.72 ; 4655,2314.25 cw(c4679.25,2314.25) 4662.1,2331.4 ccw(c4679.25,2314.25) 4655,2314.25 ; 4751.49,2306.06 ccw(c4712.98,2344.57) 4767.44,2344.57 cw(c4712.98,2344.57) 4751.49,2306.06 ; 4760.99,2315.56 cw(c4786.06,2290.49) 4786.06,2325.95 ccw(c4786.06,2290.49) 4760.99,2315.56 ; R10.1@4768.56,2323.13 ccw(c4747.12,2344.57) 4777.44,2344.57 cw(c4747.12,2344.57) R10.1@4768.56,2323.13
  Top Layer w15: P14.8@2739.42,4024.42 cw(c2701.82,3986.82) 2755,3986.82 cw(c2808.18,3986.82) P14.8@2770.58,4024.42 ; v1@2750.56,3414.44 ccw(c2739.84,3425.16) 2755,3425.16 ccw(c2770.16,3425.16) v1@2759.44,3414.44 ; v1(2755,3410) P14.8@2755,4040 ; 3455,2491.64 cw(c3446.33,2459.3) C9.1@3478.49,2468.63 ; 3466.43,2204.87 cw(c3501.73,2195.41) R34.1@3489.93,2230 ; 3468.36,2860 cw(c3500.7,2851.33) C12.2@3491.38,2883.49 ; 3482.58,2329.7 cw(c3497.22,2338.15) C8.1@3488.19,2352.44 ; 3482.58,2410.31 ccw(c3497.22,2401.85) C8.1@3488.19,2387.56 ; 3482.58,2424.7 cw(c3497.22,2433.15) C9.1@3488.19,2447.44 ; 3486.82,2041.9 cw(c3477.18,2005.94) P18.3@3512.58,2017.47 ; C12.2@3495,2884.57 3430,2819.56 v1(3430,2660) 3430,2514.57 C9.1@3479.57,2465 3489.57,2455 R34.1@3489.57,2235 3489.57,2224.57 v1(3440,2175) 3420,2155 3420,2095.74 3425.96,2089.77 3425.96,2086.24 3497.2,2015 P18.3@3505,2015 3555,1965 3555,1915 3560,1915 3565.62,1909.38 3576.48,1909.38 ; P18.3@3497.19,2013.4 ccw(c3528.58,2019.83) 3520.29,1988.88 ; P18.3@3506.6,2022.81 cw(c3500.17,1991.42) 3531.12,1999.71 ; 4683.82,4376.18 J4.4@4720,4376.18 ; 3429.28,2164.28 ccw(c3418.56,2175) 3433.72,2175 cw(c3418.56,2175) 3429.28,2164.28 ; 3429.28,2164.28 cw(c3440,2153.56) 3440,2168.72 ccw(c3440,2153.56) 3429.28,2164.28 ; 3430,2644.84 ccw(c3414.84,2644.84) 3425.56,2655.56 cw(c3414.84,2644.84) 3430,2644.84 ; 3430,2644.84 cw(c3445.16,2644.84) 3434.44,2655.56 ccw(c3445.16,2644.84) 3430,2644.84 ; 3430,2675.16 ccw(c3445.16,2675.16) 3434.44,2664.44 cw(c3445.16,2675.16) 3430,2675.16 ; 3430,2675.16 cw(c3414.84,2675.16) 3425.56,2664.44 ccw(c3414.84,2675.16) 3430,2675.16 ; 3450.72,2185.72 ccw(c3461.44,2175) 3446.28,2175 cw(c3461.44,2175) 3450.72,2185.72 ; 3450.72,2185.72 cw(c3440,2196.44) 3440,2181.28 ccw(c3440,2196.44) 3450.72,2185.72 ; 3489.57,2277.86 ccw(c3528.49,2277.86) 3500.97,2250.34 cw(c3528.49,2277.86) 3489.57,2277.86 ; 3489.57,2277.86 cw(c3450.65,2277.86) 3478.17,2250.34 ccw(c3450.65,2277.86) 3489.57,2277.86 ; 3542.6,1977.4 ccw(c3505,1939.79) 3505,1992.97 cw(c3505,1939.79) 3542.6,1977.4 ; 3542.6,1977.4 cw(c3580.21,2015) 3527.03,2015 ccw(c3580.21,2015) 3542.6,1977.4 ; 3445.33,2499.24 ccw(c3479.57,2533.49) 3479.57,2485.06 cw(c3479.57,2533.49) 3445.33,2499.24 ; 3454.08,2058.12 ccw(c3505,2109.04) 3505,2037.03 cw(c3505,2109.04) 3454.08,2058.12 ; 3454.83,2489.74 cw(c3434.03,2468.94) 3463.45,2468.94 ccw(c3434.03,2468.94) 3454.83,2489.74 ; 3457.45,2192.45 ccw(c3418.84,2231.06) 3473.45,2231.06 cw(c3418.84,2231.06) 3457.45,2192.45 ; 3460.76,2850.32 ccw(c3426.52,2884.57) 3474.94,2884.57 cw(c3426.52,2884.57) 3460.76,2850.32 ; C8.1@3468.17,2354.67 cw(c3416.5,2303) 3489.57,2303 ccw(c3416.5,2303) C8.1@3468.17,2354.67 ; C8.1@3468.17,2385.34 ccw(c3416.5,2437) 3489.57,2437 cw(c3416.5,2437) C8.1@3468.17,2385.34 ; C9.1@3468.17,2449.67 cw(c3416.5,2398) 3489.57,2398 ccw(c3416.5,2398) C9.1@3468.17,2449.67 ; 3470.26,2859.83 cw(c3491.07,2839.03) 3491.07,2868.44 ccw(c3491.07,2839.03) 3470.26,2859.83 ; 3472.91,2039.29 cw(c3448.62,2015) 3482.97,2015 ccw(c3448.62,2015) 3472.91,2039.29 ; R34.1@3473.13,2208.13 cw(c3489.57,2191.7) 3489.57,2214.94 ccw(c3489.57,2191.7) R34.1@3473.13,2208.13 ; C8.1@3478.77,2365.27 cw(c3452.72,2339.21) 3489.57,2339.21 ccw(c3452.72,2339.21) C8.1@3478.77,2365.27 ; C8.1@3478.77,2374.73 ccw(c3452.72,2400.79) 3489.57,2400.79 cw(c3452.72,2400.79) C8.1@3478.77,2374.73 ; C9.1@3478.77,2460.27 cw(c3452.72,2434.21) 3489.57,2434.21 ccw(c3452.72,2434.21) C9.1@3478.77,2460.27 ; 3479.69,2032.51 ccw(c3505,2057.82) 3505,2022.03 cw(c3505,2057.82) 3479.69,2032.51
  Top Layer w20: v1(3540,2705) 3540,2770 3637.01,2867.01 3725.98,2867.01 3757.99,2835 3757.99,2592.01 3780,2570 3960,2570 4010,2520 4205,2520 4260,2465 v1(4260,2215) 4340,2215 4405,2280 4580.43,2280 R7.1@4645,2344.57 ; v1@4825,1610 4890,1675 4890,2150 4790,2250 R10.1@4790,2344.57 4819.57,2344.57 ; v1@4827.6,1603.82 cw(c4848.8,1603.82) 4833.81,1618.81 ; v2(4915,3092.99) 4915,2440 4819.57,2344.57 ; 4790,2311.68 ccw(c4757.11,2311.68) 4780.37,2334.94 cw(c4757.11,2311.68) 4790,2311.68 ; 4790,2311.68 cw(c4822.89,2311.68) 4799.63,2334.94 ccw(c4822.89,2311.68) 4790,2311.68 ; 4819.57,2344.57 ccw(c4819.57,2327.27) 4805.23,2336.95 cw(c4819.57,2327.27) 4819.57,2344.57 ; 4819.57,2344.57 cw(c4819.57,2361.87) 4805.23,2352.19 ccw(c4819.57,2361.87) 4819.57,2344.57 ; 4915,3069.61 ccw(c4891.62,3069.61) 4908.15,3086.14 cw(c4891.62,3069.61) 4915,3069.61 ; 4915,3069.61 cw(c4938.38,3069.61) 4921.85,3086.14 ccw(c4938.38,3069.61) 4915,3069.61 ; 4000.01,2529.99 cw(c3985.02,2515) 4006.22,2515 ccw(c3985.02,2515) 4000.01,2529.99 ; v1@4012.67,2512.33 cw(c4031.2,2493.8) 4031.2,2520 ccw(c4031.2,2493.8) v1@4012.67,2512.33 ; 4615.02,2314.59 ccw(c4585.05,2344.57) 4627.44,2344.57 cw(c4585.05,2344.57) 4615.02,2314.59 ; R7.1@4624.53,2324.1 cw(c4641.06,2307.56) 4641.06,2330.95 ccw(c4641.06,2307.56) R7.1@4624.53,2324.1 ; R10.1@4793.94,2338.19 ccw(c4793.94,2384.67) 4826.8,2351.8 cw(c4793.94,2384.67) R10.1@4793.94,2338.19 ; R10.1@4793.94,2358.19 ccw(c4793.94,2452.96) 4860.95,2385.95 cw(c4793.94,2452.96) R10.1@4793.94,2358.19
  Top Layer w25: 1559.99,4479.99 1559.99,4645 1699.49,4784.51 2034.47,4784.51 2034.98,4785.02 2115,4705 2115,4540 2526.18,4128.82 U4.8@2550.16,4128.82 2660,4128.82 P14.8@2748.82,4040 ; 2730.3,4058.51 cw(c2711.79,4040) P14.8@2737.97,4040 ; P14.8@2755,4040 2840.02,4125.02 2840.02,4330.02 P1.2@3065,4555 3295.02,4785.02 3865.42,4785.02 3910,4740.43 4404.57,4740.43 4465,4680 4465,4510 ; P14.8@2772.03,4040 cw(c2813.14,4040) 2784.07,4069.07 cw(c2755,4098.14) P14.8@2755,4057.03 ; v1@2829.1,4284.1 cw(c2802.72,4257.72) 2840.02,4257.72 ; v1@2829.1,4285.9 ccw(c2802.72,4312.28) 2840.02,4312.28 ; P1.2@3047.97,4555 cw(c3006.86,4555) 3035.93,4525.93 cw(c3065,4496.86) P1.2@3065,4537.97 ; P1.2@3065,4572.03 ccw(c3065,4613.14) 3094.07,4584.07 ccw(c3123.14,4555) P1.2@3082.03,4555 ; 4415.2,4123.46 ccw(c4434.78,4134.77) pad.0@4437.72,4112.35 ; 4424.23,4156.12 cw(c4377.93,4129.39) pad.0@4424.69,4103.48 ; 4517.86,3728.61 cw(c4501.41,3667.24) C30.1@4556.43,3699.01 ; U7.1@4597.87,4269.45 4619.45,4269.45 4655,4305 4655,4355 4680,4380 4680,4485 4655,4510 4465,4510 ; R7.1@4645,2344.57 v1(4725,2344.57) R10.1@4790,2344.57 ; J2.4@4721.69,3413.44 4695,3440.13 4695,3585 v1(4740,3630) 4750,3640 4750,3704.57 C30.1@4570,3704.57 4561.43,3704.57 4556,3710 4530,3710 ; C31.1@4752.79,3692.13 cw(c4737.49,3678.39) 4755.3,3668.11 ; P14.8@2755,4057.03 cw(c2755,4113.06) 2715.38,4073.44 ccw(c2755,4113.06) P14.8@2755,4057.03 ; 4465,4510 4415,4460 4415,4090 4475,4030 ; 4475,4030 cw(c4521.97,4076.97) 4457.09,4091.24 ccw(c4521.97,4076.97) 4475,4030 ; 4475,4030 4475,3765 4530,3710 ; 4530,3710 cw(c4530,3673.57) 4557.63,3697.32 ccw(c4530,3673.57) 4530,3710 ; 4600.79,3704.57 ccw(c4600.79,3677.72) 4581.8,3696.7 cw(c4600.79,3677.72) 4600.79,3704.57 ; 4600.79,3704.57 cw(c4600.79,3731.42) 4581.8,3712.43 ccw(c4600.79,3731.42) 4600.79,3704.57 ; 4675.79,2344.57 ccw(c4675.79,2317.72) 4656.8,2336.7 cw(c4675.79,2317.72) 4675.79,2344.57 ; 4675.79,2344.57 cw(c4675.79,2371.42) 4656.8,2352.43 ccw(c4675.79,2371.42) 4675.79,2344.57 ; 4759.21,2344.57 ccw(c4759.21,2371.42) 4778.2,2352.43 cw(c4759.21,2371.42) 4759.21,2344.57 ; 4759.21,2344.57 cw(c4759.21,2317.72) 4778.2,2336.7 ccw(c4759.21,2317.72) 4759.21,2344.57 ; 3889.29,4761.14 cw(c3863.58,4735.43) 3899.94,4735.43 ccw(c3863.58,4735.43) 3889.29,4761.14 ; C26.2@3926.8,4727.57 cw(c3957.86,4696.51) 3957.86,4740.43 ccw(c3957.86,4696.51) C26.2@3926.8,4727.57 ; 4012.14,4740.43 cw(c4012.14,4696.51) 4043.2,4727.57 ccw(c4012.14,4696.51) 4012.14,4740.43 ; C29.1@4066.8,4727.57 cw(c4097.86,4696.51) 4097.86,4740.43 ccw(c4097.86,4696.51) C29.1@4066.8,4727.57 ; 4164.21,4740.43 cw(c4164.21,4713.58) 4183.2,4732.57 ccw(c4164.21,4713.58) 4164.21,4740.43 ; C28.1@4206.8,4732.57 cw(c4225.79,4713.58) 4225.79,4740.43 ccw(c4225.79,4713.58) C28.1@4206.8,4732.57 ; 4415,4137.25 ccw(c4482.25,4137.25) 4434.7,4089.7 cw(c4482.25,4137.25) 4415,4137.25 ; 4415,4197.6 ccw(c4542.6,4197.6) 4452.37,4107.37 cw(c4542.6,4197.6) 4415,4197.6 ; pad.0@4432.67,4096.61 ccw(c4469.04,4088.61) 4442.71,4062.29 cw(c4469.04,4088.61) pad.0@4432.67,4096.61 ; 4494.79,3745.21 ccw(c4566.06,3816.49) 4566.06,3715.69 cw(c4566.06,3816.49) 4494.79,3745.21 ; 4537.46,3702.54 ccw(c4566.06,3731.14) 4566.06,3690.69 cw(c4566.06,3731.14) 4537.46,3702.54 ; U7.1@4606.73,4278.6 ccw(c4606.73,4331.41) 4644.07,4294.07 cw(c4606.73,4331.41) U7.1@4606.73,4278.6 ; 4722.14,3704.57 cw(c4722.14,3660.65) 4753.2,3691.7 ccw(c4722.14,3660.65) 4722.14,3704.57 ; v1@4739.1,3630.9 ccw(c4712.77,3657.23) 4750,3657.23 cw(c4712.77,3657.23) v1@4739.1,3630.9 ; 4750,3646.01 cw(c4814.62,3646.01) 4768.93,3691.7 ccw(c4814.62,3646.01) 4750,3646.01
  Top Layer w32: v1@2392.5,3152.5 2430,3115